# Altium PCB ArduinoUno_project.PcbDoc
Units mm, origin at the board's own origin, x right, y up, seen from the top; angles counter-clockwise.
Board outline 83.75 x 64.31 mm, 2 copper layers (Top Layer, Bottom Layer); 52 components, 58 nets, 214 pads, 25 vias.
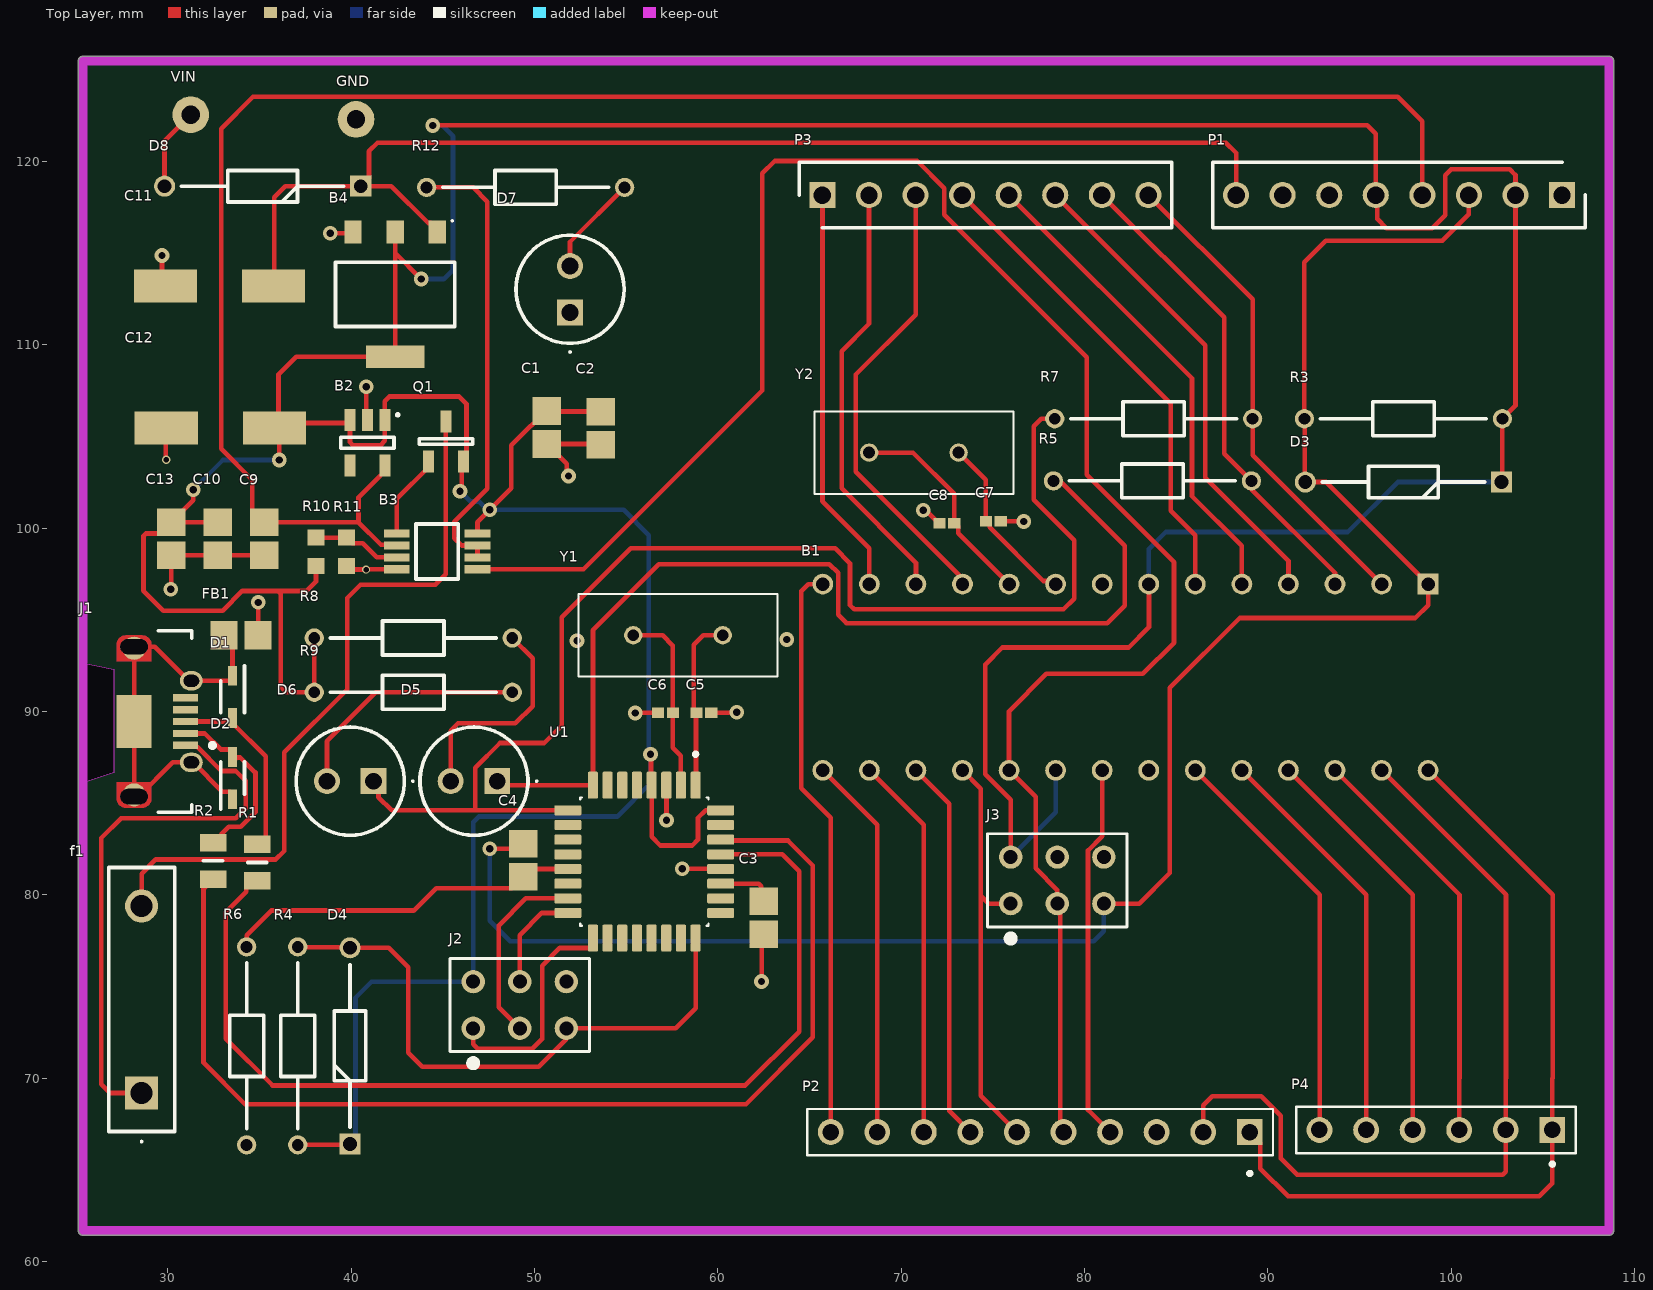
[diagram p0: Top Layer view]
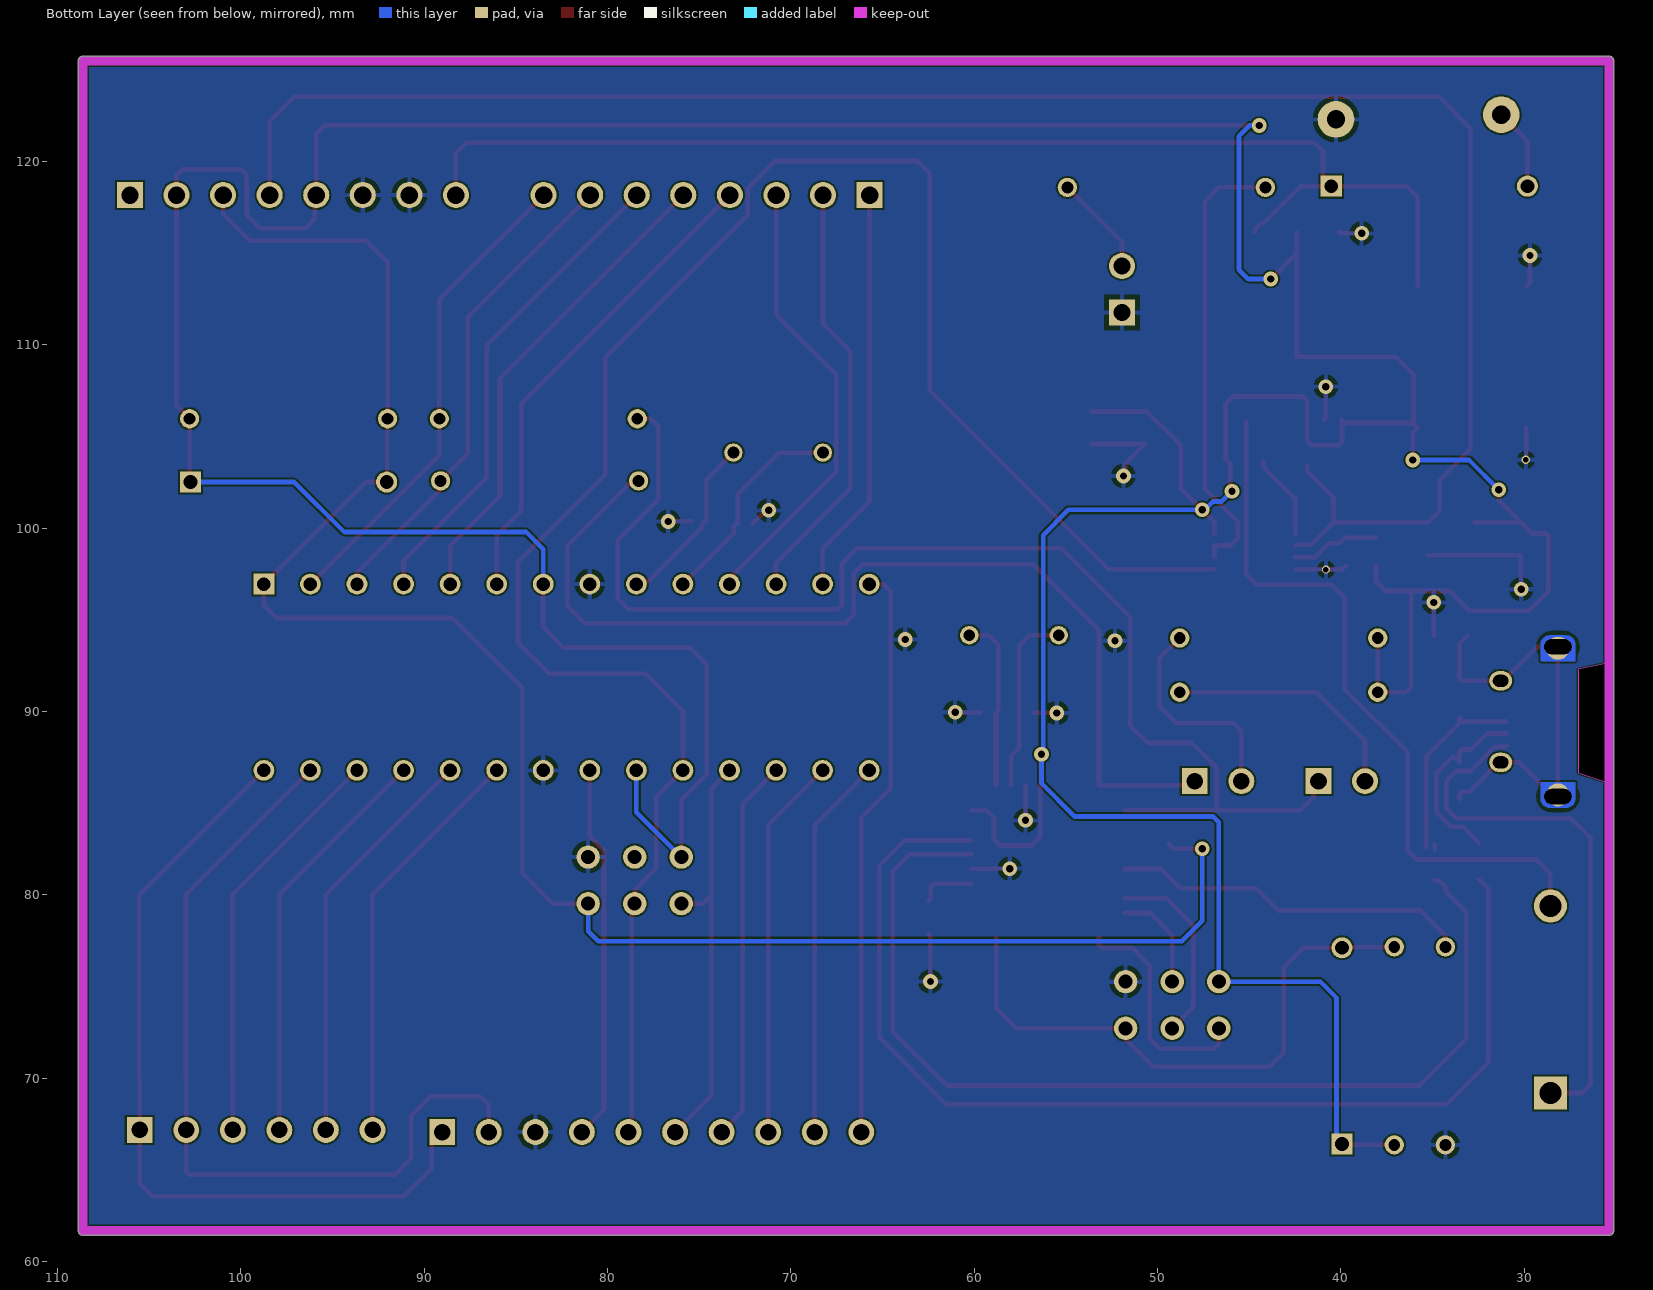
[diagram p1: Bottom Layer view, seen from below]
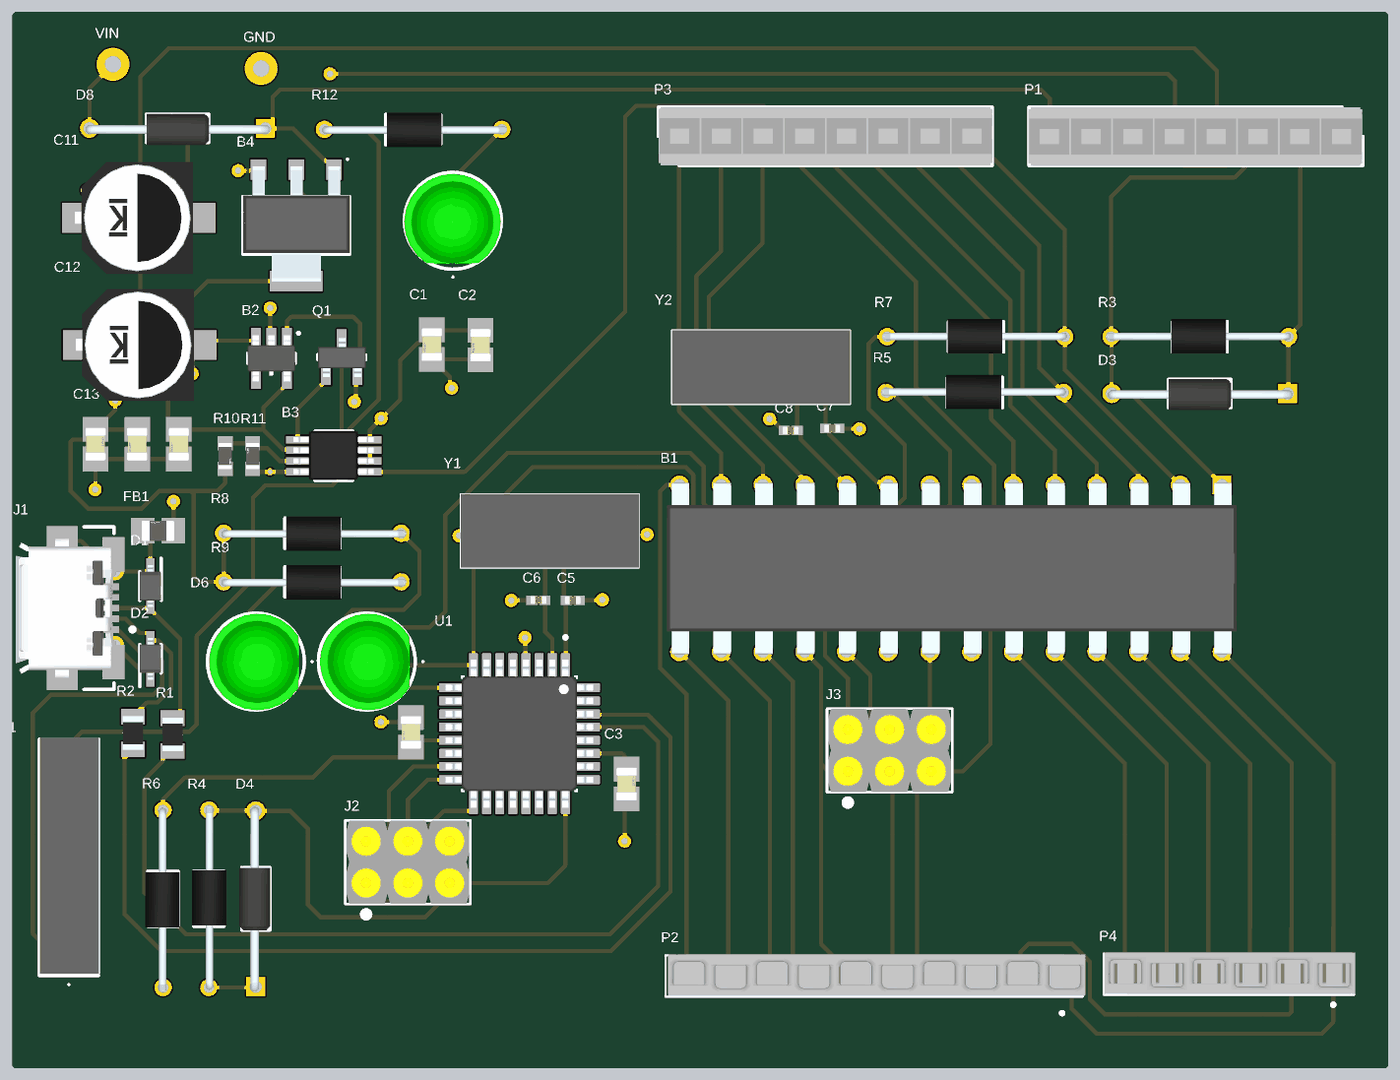
[diagram p2: 3D render of the assembled board from above, using the file's embedded part models]

## Layer stack, top to bottom
Top Solder: solder mask 0.0102, Solder Resist, Dk 3.5
Top Layer: signal copper 0.0356
Dielectric 1: dielectric 0.32, FR-4, Dk 4.8
Bottom Layer: signal copper 0.0356
Bottom Solder: solder mask 0.0102, Solder Resist, Dk 3.5

## Board outline
25.11,61.68 25.11,125.488 cw(c25.36,125.488) 25.36,125.738 108.61,125.738 cw(c108.61,125.488) 108.86,125.488 cw(c108.61,125.488) 108.858,125.454 cw(c108.61,125.42) 108.86,125.42 108.86,61.71 cw(c108.61,61.71) 108.86,61.695 cw(c108.61,61.68) 108.86,61.68 cw(c108.61,61.68) 108.61,61.43 25.36,61.43 cw(c25.36,61.68)

## Design rules (kind name [scope] priority, off if disabled: settings)
Clearance [All] p1: gap=0.1 ignorepadtopadclearanceinfootprint=FALSE
PolygonConnect [All] p1: connectstyle=Relief reliefconductorwidth=0.254 reliefentries=4 polygonreliefangle="90 Angle" airgapwidth=0.254
RoutingVias [All] p1: holewidth=0.711 width=1.27 viastyle="Through Hole" minholewidth=0.711 minwidth=1.27 maxholewidth=0.711 maxwidth=1.27
SolderMaskExpansion [All] p1: expansion=0.102
Width [All] p1: maxlimit=0.254 minlimit=0.254 preferedwidth=0.254
30 further rules are at their usual default settings.

## Components (designator, comment, footprint, x,y, rotation, side; value= is the part's Value field where it differs from the comment)
B1 "ATMEGA328-PU" DIP1016W53P254L3468H457Q28N 82.23,91.87 r270 top
B2 "LP2985-33DBVT" SOT95P280X145-5N 40.88,104.66 r270 top
B3 "LMV358IDGKR" SOP65P490X110-8N 44.68,98.73 r0 top
B4 "NCP1117ST50T3G" SOT230P700X180-4N 42.39,112.75 r270 top
C1 "100nF" C0805 50.65,105.491 r90 top
C2 "100nF" C0805 53.61,105.46 r90 top
C3 "1uF" C0805 62.5,78.75 r270 top
C4 "100nF" C0805 49.38,81.89 r90 top
C5 "22pF" C0402 59.23,89.93 r180 top
C6 "22pF" C0402 57.14,89.94 r180 top
C7 "22pF" C0402 75.02,100.39 r180 top
C8 "22pF" C0402 72.49,100.27 r180 top
C9 "1uF" C0805 35.25,99.43 r90 top
C10 "100nF" C0805 32.715,99.43 r90 top
C11 "47uF" CAPAE660X565N 32.81,113.21 r180 top
C12 "47uF" CAPAE660X565N 32.86,105.47 r180 top
C13 "100nF" C0805 30.18,99.43 r270 top
D1 "CDSOD323-T05S" SOD2513X114N 33.52,90.8 r270 top
D2 "CDSOD323-T05S" SOD2513X114N 33.52,86.37 r90 top
D3 "1N914" DIOAD1068W53L380D172 102.74,102.515 r180 top
D4 "1N914" DIOAD1068W53L380D172 39.93,66.41 r90 top
D5 "TLHG5420-ASZ" TLHG5420ASZ 47.96,86.2 r0 top
D6 "TLHG5420-ASZ" TLHG5420ASZ 41.21,86.2 r0 top
D7 "TLHG5420-ASZ" TLHG5420ASZ 51.93,111.76 r270 top
D8 "1N914" DIOAD1068W53L380D172 40.513,118.655 r180 top
f1 "PPTC" MFRHS10000 28.56,69.19 r90 top
FB1 "1 kOhms @ 100MHz" BLM21 33.984,94.16 r180 top
GND "Function" "Pin - 1" 40.259,122.301 r0 top
J1 "ZX62RD-AB-5P8(30)" FP-ZX62RD-AB-5P8_30-MFG 27.925,89.45 r270 top
J2 "TD-103-G-A" SAMTEC_TD-103-G-A 51.73,75.26 r0 top
J3 "TD-103-G-A" SAMTEC_TD-103-G-A 81.05,82.06 r0 top
P1 "8P" RHDR8W76P0X254_1X8_2032X356X673P 106.044,118.172 r180 top
P2 "1-215297-0" TE_1-215297-0 77.58,67.06 r180 top
P3 "8P" RHDR8W76P0X254_1X8_2032X356X673P 65.701,118.172 r0 top
P4 "6P" TE_215299-6 99.164,67.171 r180 top
Q1 "FDN340P" SOT95P237X112-3N 45.16,104.73 r90 top
R1 "22R" R0805 34.87,81.76 r270 top
R2 "22R" R0805 32.46,81.85 r270 top
R3 "10k" RESAD1075W45L335D185 91.99,105.97 r0 top
R4 "10k" RESAD1075W45L335D185 37.078,77.16 r270 top
R5 "1k" RESAD1075W45L335D185 78.3,102.58 r0 top
R6 "1k" RESAD1075W45L335D185 34.29,66.36 r90 top
R7 "1k" RESAD1075W45L335D185 78.37,105.97 r0 top
R8 "1k" RESAD1075W45L335D185 48.78,94.01 r180 top
R9 "1k" RESAD1075W45L335D185 48.78,91.05 r180 top
R10 "10k" RC0603 38.07,98.71 r270 top
R11 "10k" RC0603 39.74,98.71 r90 top
R12 "1k" RESAD1075W45L335D185 54.91,118.59 r180 top
U1 "ATMEGA16U2-AU" QFP80P900X900X120-32N 55.98,81.81 r270 top
VIN "Function" "Pin - 1" 31.242,122.555 r0 top
Y1 "ATS16B" ATS16B 55.38,94.16 r0 top
Y2 "ATS16B" ATS16B 68.25,104.12 r0 top

## Footprints (in the part's own frame and the unit in brackets; to place one, negate y for a bottom-side part, rotate by r counter-clockwise, add the part's x,y. Pads: shape width x height; smd on the part's side, far side on the other; paste and mask are expansions set on the pad)
ATS16B [mm]
  round 1 hole 0.65: 1(0,0) 2(4.88,0)
  silkscreen extent -2.99,-2.25 7.87,2.25, body extent -2.99,-2.25 7.87,2.25, height 4.4
BLM21 [mm]
  rect 1.455x1.556 smd paste+0 mask+0: 1(-0.926,0) 2(0.926,0)
  body extent -2.15,-1.28 2.15,1.28, height 0.25
C0402 [mm]
  rect 0.665x0.572 smd paste+0 mask+0: 1(-0.404,0) 2(0.404,0)
  body extent -0.89,-0.44 0.89,0.44, height 0.25
C0805 [mm]
  rect 1.505x1.556 smd paste+0 mask+0: 1(-0.901,0) 2(0.901,0)
  body extent -2.15,-1.28 2.15,1.28, height 0.25
CAPAE660X565N [mm]
  rect 3.45x1.8 smd: 1(-2.95,0) 2(2.95,0)
  body extent -3.71,-3.4 3.89,3.4, height 5.36
DIOAD1068W53L380D172 [mm]
  rect 1.15x1.15 / inner round 1.15 / far side rect 1.15x1.15 hole 0.75: 1(0,0)
  round 1.15 hole 0.75: 2(10.7,0)
  silkscreen extent 0.92,-0.86 9.77,0.86, body extent -0.27,-0.89 10.94,1.02, height 1.9
DIP1016W53P254L3468H457Q28N [mm]
  rect 1.133x1.133 / inner round 1.133 / far side rect 1.133x1.133 hole 0.733: 1(-5.08,16.51)
  round 1.133 hole 0.733: 2(-5.08,13.97) 3(-5.08,11.43) 4(-5.08,8.89) 5(-5.08,6.35) 6(-5.08,3.81) 7(-5.08,1.27) 8(-5.08,-1.27) 9(-5.08,-3.81) 10(-5.08,-6.35) 11(-5.08,-8.89) 12(-5.08,-11.43) 13(-5.08,-13.97) 14(-5.08,-16.51) 15(5.08,-16.51) 16(5.08,-13.97) 17(5.08,-11.43) 18(5.08,-8.89) 19(5.08,-6.35) 20(5.08,-3.81) 21(5.08,-1.27) 22(5.08,1.27) 23(5.08,3.81) 24(5.08,6.35) 25(5.08,8.89) 26(5.08,11.43) 27(5.08,13.97) 28(5.08,16.51)
  body extent -5.21,-17.27 5.21,17.4, height 4.57
FP-ZX62RD-AB-5P8_30-MFG [mm]
  rect 0.4x1.35 smd paste+0 mask+0: 1(1.3,3.025) 2(0.65,3.025) 3(0,3.025) 4(-0.65,3.025) 5(-1.3,3.025)
  rrect100% 1.05x1.25 hole 0.85 slot 0.65 at 0 deg paste-1000 mask+0: 6(-2.225,3.35) 7(2.225,3.35)
  rrect100% 0.825x1.5 hole 1.5 slot 0.825 at 0 deg paste-1000 mask+0: 8(-4.088,0.225) 10(4.088,0.225)
  round 1.26 smd paste-1000 mask+0: 8(-4,0.225) 10(4,0.225)
  round 1.26 smd far side paste-1000 mask+0: 8(-4,0.225) 10(4,0.225)
  rect 2.9x1.9 smd paste+0 mask+0: 9(0,0.225)
  Top Layer region: 3.3,1.175 4.2,1.175 4.391,1.137 4.554,1.029 4.662,0.866 4.7,0.675 4.7,0.675 4.7,-0.225 4.662,-0.416 4.554,-0.579 4.391,-0.687 4.2,-0.725 4.2,-0.725 3.3,-0.725
  Top Layer region: -3.3,-0.725 -4.2,-0.725 -4.391,-0.687 -4.554,-0.579 -4.662,-0.416 -4.7,-0.225 -4.7,-0.225 -4.7,0.675 -4.662,0.866 -4.554,1.029 -4.391,1.137 -4.2,1.175 -4.2,1.175 -3.3,1.175
  Bottom Layer region: -3.3,-0.725 -4.2,-0.725 -4.391,-0.687 -4.554,-0.579 -4.662,-0.416 -4.7,-0.225 -4.7,-0.225 -4.7,0.675 -4.662,0.866 -4.554,1.029 -4.391,1.137 -4.2,1.175 -4.2,1.175 -3.3,1.175
  Bottom Layer region: 3.3,1.175 4.2,1.175 4.391,1.137 4.554,1.029 4.662,0.866 4.7,0.675 4.7,0.675 4.7,-0.225 4.662,-0.416 4.554,-0.579 4.391,-0.687 4.2,-0.725 4.2,-0.725 3.3,-0.725
  Keep-Out Layer board cut-out: -2.844,-0.889 2.796,-0.889 3.367,-2.6 -3.2,-2.6
  silkscreen extent -4.95,1.55 4.95,4.62, body extent -5.1,-2.68 5.1,4.13, height 0.25
MFRHS10000 [mm]
  rect 1.8x1.8 hole 1.2: 1(0,0)
  round 1.8 hole 1.2: 2(10.2,0)
  silkscreen extent -2.7,-1.8 12.3,1.8, body extent -1.99,-1.82 12.41,1.78, height 28
"Pin - 1" [mm] "Test point pad"
  round 2 hole 1: 1(0,0)
QFP80P900X900X120-32N [mm]
  rrect25% 1.47x0.55 smd: 1(-4.17,2.8) 2(-4.17,2) 3(-4.17,1.2) 4(-4.17,0.4) 5(-4.17,-0.4) 6(-4.17,-1.2) 7(-4.17,-2) 8(-4.17,-2.8) 17(4.17,-2.8) 18(4.17,-2) 19(4.17,-1.2) 20(4.17,-0.4) 21(4.17,0.4) 22(4.17,1.2) 23(4.17,2) 24(4.17,2.8)
  rrect25% 0.55x1.47 smd: 9(-2.8,-4.17) 10(-2,-4.17) 11(-1.2,-4.17) 12(-0.4,-4.17) 13(0.4,-4.17) 14(1.2,-4.17) 15(2,-4.17) 16(2.8,-4.17) 25(2.8,4.17) 26(2,4.17) 27(1.2,4.17) 28(0.4,4.17) 29(-0.4,4.17) 30(-1.2,4.17) 31(-2,4.17) 32(-2.8,4.17)
  silkscreen extent -5.96,-3.5 3.5,3.5, body extent -4.5,-4.5 4.5,4.5, height 1.2
R0805 [mm]
  rect 0.95x1.45 smd: 1(-1,0) 2(1,0)
  silkscreen extent 0,-0.53 0,0.53, body extent -1.02,-0.63 1.02,0.63, height 0.5
RC0603 [mm]
  rect 0.859x0.912 smd paste+0 mask+0: 1(-0.777,0) 2(0.777,0)
  body extent -1.46,-0.71 1.46,0.71, height 0.25
RESAD1075W45L335D185 [mm]
  round 1.05 hole 0.65: 1(0,0) 2(10.8,0)
  silkscreen extent 0.87,-0.92 9.92,0.92, body extent -0.27,-1.02 10.93,1.08, height 2.09
RHDR8W76P0X254_1X8_2032X356X673P [mm]
  rect 1.425x1.425 / inner round 1.425 / far side rect 1.425x1.425 hole 0.95: 1(0,0)
  round 1.425 hole 0.95: 2(2.54,0) 3(5.08,0) 4(7.62,0) 5(10.16,0) 6(12.7,0) 7(15.24,0) 8(17.78,0)
  silkscreen extent -1.27,-1.78 19.05,1.78, body extent -1.24,-1.76 19.08,1.79, height 7
SAMTEC_TD-103-G-A [mil]
  round 50 hole 30: 1(-200,-100) 2(-200,0) 3(-100,-100) 4(-100,0) 5(0,-100) 6(0,0)
  silkscreen extent -250,-180 50,50, body extent -247,-150 47,50, height 326
SOD2513X114N [mm]
  rect 1.075x0.5 smd: 1(-1.15,0) 2(1.15,0)
  silkscreen extent -1.69,-0.65 0.87,0.65, body extent -1.27,-0.65 1.27,0.65, height 1.14
SOP65P490X110-8N [mm]
  rect 1.4x0.45 smd: 1(-2.2,0.975) 2(-2.2,0.325) 3(-2.2,-0.325) 4(-2.2,-0.975) 5(2.2,-0.975) 6(2.2,-0.325) 7(2.2,0.325) 8(2.2,0.975)
  silkscreen extent -1.15,-1.5 1.15,1.5, body extent -2.47,-1.49 2.43,1.51, height 1.1
SOT95P237X112-3N [mm]
  rect 1.2x0.6 smd: 1(-1.1,0.95) 2(-1.1,-0.95) 3(1.1,0)
  silkscreen extent -0.15,-1.46 0.15,1.46, body extent -1.21,-1.48 1.16,1.44, height 1.12
SOT95P280X145-5N [mm]
  rect 1.2x0.6 smd: 1(-1.25,0.95) 2(-1.25,0) 3(-1.25,-0.95) 4(1.25,-0.95) 5(1.25,0.95)
  silkscreen extent -1.55,-1.45 0.3,1.68, body extent -1.4,-1.45 1.4,1.45, height 1.2
SOT230P700X180-4N [mm]
  rect 1.25x0.95 smd: 1(-3.4,2.3) 2(-3.4,0) 3(-3.4,-2.3)
  rect 1.25x3.2 smd: 4(3.4,0)
  silkscreen extent -4.03,-3.25 1.75,3.25, body extent -3.58,-3.23 3.42,3.27, height 1.8
TE_1-215297-0 [mm]
  rect 1.408x1.408 hole 0.9: 1(-11.43,0)
  round 1.408 hole 0.9: 2(-8.89,0) 3(-6.35,0) 4(-3.81,0) 5(-1.27,0) 6(1.27,0) 7(3.81,0) 8(6.35,0) 9(8.89,0) 10(11.43,0)
  silkscreen extent -12.7,-1.26 12.7,2.36, body extent -12.85,-1.32 12.55,1.2, height 7
TE_215299-6 [mm]
  rect 1.408x1.408 hole 0.9: 1(-6.35,0)
  round 1.408 hole 0.9: 2(-3.81,0) 3(-1.27,0) 4(1.27,0) 5(3.81,0) 6(6.35,0)
  silkscreen extent -7.62,-1.26 7.62,1.96, body extent -7.68,-1.31 7.56,1.21, height 9
TLHG5420ASZ [mm]
  rect 1.416x1.416 hole 0.91: 1(0,0)
  round 1.416 hole 0.91: 2(-2.54,0)
  silkscreen extent -4.22,-2.95 2.2,2.95, body extent -4.12,-2.97 1.33,2.92, height 11.14

## Part data
B1: "8-bit Microcontrollers - MCU AVR 32K FLSH 1K EE2K SRAM-20MHz IND", Manufacturer_Name=Microchip, Mouser Part Number=556-ATMEGA328-PU, Datasheet Link=https://componentsearchengine.com/Datasheets/1/ATMEGA328-PU.pdf, Geometry.Height=4.572mm, Manufacturer_Part_Number=ATMEGA328-PU, Mouser Price/Stock=https://www.mouser.co.uk/ProductDetail/Microchip-Technology/ATMEGA328-PU?qs=lwdSMh1%2FoYJT8tfItQpQtA%3D%3D
B2: "150-mA LOW-NOISE LOW-DROPOUT REGULATOR WITH SHUTDOWN", Manufacturer_Name="Texas Instruments", Mouser Part Number=595-LP2985-33DBVT, Datasheet Link=http://www.ti.com/lit/gpn/lp2985, Geometry.Height=1.45mm, Manufacturer_Part_Number=LP2985-33DBVT, Mouser Price/Stock=https://www.mouser.co.uk/ProductDetail/Texas-Instruments/LP2985-33DBVT?qs=paYhMW8qfivCywxvLCGbYQ%3D%3D
B3: "OP Amp Dual GP R-R O/P 5.5V 8-Pin MSOP Texas Instruments LMV358IDGKR, Dual Op Amp, 1MHz CMOS, Rail to Rail, 3 V, 5 V, 8-Pin MSOP", Manufacturer_Name="Texas Instruments", Mouser Part Number=595-LMV358IDGKR, Datasheet Link=http://www.ti.com/lit/ds/symlink/lmv358.pdf, Geometry.Height=1.1mm, Manufacturer_Part_Number=LMV358IDGKR, Mouser Price/Stock=https://www.mouser.co.uk/ProductDetail/Texas-Instruments/LMV358IDGKR?qs=rgxfVHSNRPXxzk3brtXqQw%3D%3D
B4: "ON SEMICONDUCTOR - NCP1117ST50T3G - LDO, REG, 20VIN, 1A, 5V, 1%, SOT223-3", Manufacturer_Name=onsemi, Mouser Part Number=863-NCP1117ST50T3G, Datasheet Link=http://www.onsemi.com/pub/Collateral/NCP1117-D.PDF, Geometry.Height=1.8mm, Manufacturer_Part_Number=NCP1117ST50T3G, Mouser Price/Stock=https://www.mouser.co.uk/ProductDetail/onsemi/NCP1117ST50T3G?qs=Gev%252BmEvV0ib6dijy6U0dhQ%3D%3D
C1 C2 C4 C10 C13: library part C0805C104M3RACTU, "Cap Ceramic 0.1uF 25V X7R 20% SMD 0805 125°C Paper T/R", Case/Package=0805, Case Code (Metric)=2012, Dielectric=X7R, Dielectric Material=Ceramic, Manufacturer=KEMET, Max Operating Temperature=125°C, Min Operating Temperature=-55°C, Package Quantity=1, Supplier Part Number 1=399-C0805C104M3RAC7800CT-ND, Tolerance=20%, Voltage=25V, Capacitance=100nF, Case Code (Imperial)=0805, ComponentLink1Description=http://www.farnell.com/datasheets/2746330.pdf?src-supplier=Farnell, ComponentLink1URL=http://www.farnell.com/datasheets/2746330.pdf?src-supplier=Farnell, ComponentLink2Description=https://www.alliedelec.com/m/d/6f3b5eb83d09db50ed28bdc730567b33.pdf?src-supplier=Allied+Electronics, ComponentLink2URL=https://www.alliedelec.com/m/d/6f3b5eb83d09db50ed28bdc730567b33.pdf?src-supplier=Allied+Electronics, ComponentLink3Description=http://uk.rs-online.com/webdocs/13da/0900766b813daa05.pdf?src-supplier=RSComponents, ComponentLink3URL=http://uk.rs-online.com/webdocs/13da/0900766b813daa05.pdf?src-supplier=RSComponents, ComponentLink4Description=http://uk.rs-online.com/webdocs/13da/0900766b813da9ff.pdf?src-supplier=RSComponents, ComponentLink4URL=http://uk.rs-online.com/webdocs/13da/0900766b813da9ff.pdf?src-supplier=RSComponents, ComponentLink5Description=https://www.alliedelec.com/m/d/e7aa2b5497e2375e4ffc0e8be19e16e2.pdf?src-supplier=Allied+Electronics, ComponentLink5URL=https://www.alliedelec.com/m/d/e7aa2b5497e2375e4ffc0e8be19e16e2.pdf?src-supplier=Allied+Electronics, ComponentLink6Description=http://www.jameco.com/Jameco/Products/ProdDS/1566487.pdf?src-supplier=Jameco, ComponentLink6URL=http://www.jameco.com/Jameco/Products/ProdDS/1566487.pdf?src-supplier=Jameco, ComponentLink7Description=http://www.mouser.com/ds/2/212/KEM_C1002_X7R_SMD-1102033.pdf?src-supplier=Mouser, ComponentLink7URL=http://www.mouser.com/ds/2/212/KEM_C1002_X7R_SMD-1102033.pdf?src-supplier=Mouser, ComponentLink8Description=http://components.arrow.com/part/dataview/2091097S3491315N7429?src-supplier=Arrow+Electronics, ComponentLink8URL=http://components.arrow.com/part/dataview/2091097S3491315N7429?src-supplier=Arrow+Electronics, ComponentLink9Description=http://components.arrow.com/part/dataview/0323_00178100?src-supplier=Arrow+Europe, ComponentLink9URL=http://components.arrow.com/part/dataview/0323_00178100?src-supplier=Arrow+Europe, ComponentLink10Description=https://api.kemet.com/component-edge/download/datasheet/C0805C104M3RACTU.pdf?src-supplier=Digi-Key, ComponentLink10URL=https://api.kemet.com/component-edge/download/datasheet/C0805C104M3RACTU.pdf?src-supplier=Digi-Key, ComponentLink11Description=http://www.farnell.com/datasheets/2746330.pdf?src-supplier=Newark, ComponentLink11URL=http://www.farnell.com/datasheets/2746330.pdf?src-supplier=Newark, ComponentLink12Description=http://www.farnell.com/datasheets/1828800.pdf?src-supplier=Newark, ComponentLink12URL=http://www.farnell.com/datasheets/1828800.pdf?src-supplier=Newark, ComponentLink13Description=http://capacitoredge.kemet.com/capedge2/DataSheet?pn=C0805C104M3RACTU&src-supplier=Avnet, ComponentLink13URL=http://capacitoredge.kemet.com/capedge2/DataSheet?pn=C0805C104M3RACTU&src-supplier=Avnet, ComponentLink14Description=http://www.farnell.com/datasheets/2746330.pdf?src-supplier=Element14, ComponentLink14URL=http://www.farnell.com/datasheets/2746330.pdf?src-supplier=Element14, Construction=Flat, Depth=1.25mm, Dissipation Factor=5%, Height=0.9mm, Lead Pitch=0.75mm, Length=2mm, Manufacturer Part Number=C0805C104M3RACTU, Mount="Surface Mount", Packaging="Tape and Reel", Pricing 1="1 = 0,10000, 10 = 0,06200, 50 = 0,03360, 100 = 0,02750, 500 = 0,01964, 1000 = 0,01543 (USD)", Radiation Hardening=No, REACH SVHC="No SVHC", RoHS=Yes, Series=C0805C, Stock 1=190801, Supplier 1=Digi-Key, Termination=SMD/SMT, Thickness=0.035inch, Voltage Rating=25V, Voltage Rating (DC)=25V, Width=0.049inch
C3 C9: library part C0805C105M3RACTU, "Multilayer Ceramic Capacitors MLCC - SMD/SMT 25V 1uF X7R 0805 20%", Case/Package=0805, Case Code (Metric)=2012, Dielectric=X7R, Dielectric Material=Ceramic, Manufacturer=KEMET, Manufacturer Part Number=C0805C104M3RACTU, Max Operating Temperature=125°C, Min Operating Temperature=-55°C, Package Quantity=1, Supplier Part Number 1=399-C0805C104M3RAC7800CT-ND, Tolerance=20%, Voltage=25V, Capacitance=1uF, Case Code (Imperial)=0805, ComponentLink1Description=http://www.farnell.com/datasheets/2746330.pdf?src-supplier=Farnell, ComponentLink1URL=http://www.farnell.com/datasheets/2746330.pdf?src-supplier=Farnell, ComponentLink2Description=https://www.alliedelec.com/m/d/6f3b5eb83d09db50ed28bdc730567b33.pdf?src-supplier=Allied+Electronics, ComponentLink2URL=https://www.alliedelec.com/m/d/6f3b5eb83d09db50ed28bdc730567b33.pdf?src-supplier=Allied+Electronics, ComponentLink3Description=http://uk.rs-online.com/webdocs/13da/0900766b813daa05.pdf?src-supplier=RSComponents, ComponentLink3URL=http://uk.rs-online.com/webdocs/13da/0900766b813daa05.pdf?src-supplier=RSComponents, ComponentLink4Description=http://uk.rs-online.com/webdocs/13da/0900766b813da9ff.pdf?src-supplier=RSComponents, ComponentLink4URL=http://uk.rs-online.com/webdocs/13da/0900766b813da9ff.pdf?src-supplier=RSComponents, ComponentLink5Description=https://www.alliedelec.com/m/d/e7aa2b5497e2375e4ffc0e8be19e16e2.pdf?src-supplier=Allied+Electronics, ComponentLink5URL=https://www.alliedelec.com/m/d/e7aa2b5497e2375e4ffc0e8be19e16e2.pdf?src-supplier=Allied+Electronics, ComponentLink6Description=http://www.jameco.com/Jameco/Products/ProdDS/1566487.pdf?src-supplier=Jameco, ComponentLink6URL=http://www.jameco.com/Jameco/Products/ProdDS/1566487.pdf?src-supplier=Jameco, ComponentLink7Description=http://www.mouser.com/ds/2/212/KEM_C1002_X7R_SMD-1102033.pdf?src-supplier=Mouser, ComponentLink7URL=http://www.mouser.com/ds/2/212/KEM_C1002_X7R_SMD-1102033.pdf?src-supplier=Mouser, ComponentLink8Description=http://components.arrow.com/part/dataview/2091097S3491315N7429?src-supplier=Arrow+Electronics, ComponentLink8URL=http://components.arrow.com/part/dataview/2091097S3491315N7429?src-supplier=Arrow+Electronics, ComponentLink9Description=http://components.arrow.com/part/dataview/0323_00178100?src-supplier=Arrow+Europe, ComponentLink9URL=http://components.arrow.com/part/dataview/0323_00178100?src-supplier=Arrow+Europe, ComponentLink10Description=https://api.kemet.com/component-edge/download/datasheet/C0805C104M3RACTU.pdf?src-supplier=Digi-Key, ComponentLink10URL=https://api.kemet.com/component-edge/download/datasheet/C0805C104M3RACTU.pdf?src-supplier=Digi-Key, ComponentLink11Description=http://www.farnell.com/datasheets/2746330.pdf?src-supplier=Newark, ComponentLink11URL=http://www.farnell.com/datasheets/2746330.pdf?src-supplier=Newark, ComponentLink12Description=http://www.farnell.com/datasheets/1828800.pdf?src-supplier=Newark, ComponentLink12URL=http://www.farnell.com/datasheets/1828800.pdf?src-supplier=Newark, ComponentLink13Description=http://capacitoredge.kemet.com/capedge2/DataSheet?pn=C0805C104M3RACTU&src-supplier=Avnet, ComponentLink13URL=http://capacitoredge.kemet.com/capedge2/DataSheet?pn=C0805C104M3RACTU&src-supplier=Avnet, ComponentLink14Description=http://www.farnell.com/datasheets/2746330.pdf?src-supplier=Element14, ComponentLink14URL=http://www.farnell.com/datasheets/2746330.pdf?src-supplier=Element14, Construction=Flat, Depth=1.25mm, Dissipation Factor=5%, Height=0.9mm, Lead Pitch=0.75mm, Length=2mm, Mount="Surface Mount", Packaging="Tape and Reel", Pricing 1="1 = 0,10000, 10 = 0,06200, 50 = 0,03360, 100 = 0,02750, 500 = 0,01964, 1000 = 0,01543 (USD)", Radiation Hardening=No, REACH SVHC="No SVHC", RoHS=Yes, Series=C0805C, Stock 1=190801, Supplier 1=Digi-Key, Termination=SMD/SMT, Thickness=0.035inch, Voltage Rating=25V, Voltage Rating (DC)=25V, Width=0.049inch
C5 C6 C7 C8: library part C0402C220K5GACTU, "CAP CER 22PF 50V C0G/NP0 0402", Case/Package=0402, Case Code (Metric)=1005, Dielectric=C0G, Dielectric Material=Ceramic, Manufacturer=KEMET, Max Operating Temperature=125°C, Min Operating Temperature=-55°C, Package Quantity=1, Supplier Part Number 1=399-7775-1-ND, Tolerance=10%, Voltage Rating=50V, Capacitance=22pF, Case Code (Imperial)=0402, Category="Ceramic Capacitors", ComponentLink1Description=https://datasheet.ciiva.com/18192/getdatasheetpartid-362104-18192458.pdf?src-supplier=Verical, ComponentLink1URL=https://datasheet.ciiva.com/18192/getdatasheetpartid-362104-18192458.pdf?src-supplier=Verical, ComponentLink2Description=https://datasheet.ciiva.com/6874/1828801-6874332.pdf?src-supplier=Newark, ComponentLink2URL=https://datasheet.ciiva.com/6874/1828801-6874332.pdf?src-supplier=Newark, ComponentLink3Description=https://datasheet.ciiva.com/5423/kem-c1003-c0g-smd-356956-5423869.pdf?src-supplier=Mouser, ComponentLink3URL=https://datasheet.ciiva.com/5423/kem-c1003-c0g-smd-356956-5423869.pdf?src-supplier=Mouser, Depth=0.5mm, Dissipation Factor=0.1%, Height=0.5mm, Lead Free="Lead Free", Lead Pitch=0.3mm, Length=1mm, Manufacturer Part Number=C0402C220K5GACTU, Mount="Surface Mount", Packaging="Tape and Reel", Pricing 1="1=0,10000, 10=0,02100, 50=0,01160, 100=0,00950, 500=0,00678, 1000=0,00532, 2500=0,00484, 5000=0,00445 (USD)", Radiation Hardening=No, REACH SVHC="No SVHC", RoHS=Yes, Stock 1=2121934, Supplier 1=Digi-Key, Termination=SMD/SMT, Thickness=0.022inch, Voltage Rating (DC)=50V, Width=0.02inch
C11 C12: library part EDK476M025A9GAA, "Cap Aluminum 47uF 25V 20% (6.3 X 5.4mm) SMD 70mA 2000 hr 85°C T/R -    PN Alternativo : EDK476M025A9GAA", Case/Package=Radial, Manufacturer=KEMET, Max Operating Temperature=85°C, Min Operating Temperature=-40°C, Package Quantity=1, Ripple Current=70mA, Supplier Part Number 1=80-EDK476M025A9GAA, Tolerance=20%, Voltage Rating=25V, Capacitance=47uF, ComponentLink1Description=https://datasheet.ciiva.com/5365/kem-a4001-edk-535350-5365071.pdf?src-supplier=Mouser, ComponentLink1URL=https://datasheet.ciiva.com/5365/kem-a4001-edk-535350-5365071.pdf?src-supplier=Mouser, Construction=Cylindrical, Diameter=6.3mm, Height=5.4mm, Height - Seated (Max)=0.217inch, Length=5.5mm, Life (Hours)=2000Hour, Manufacturer Part Number=EDK476M025A9GAA, Mount="Surface Mount,PCB", Packaging="Tape and Reel", Pricing 1="1 = 0,39000, 10 = 0,19000, 50 = 0,19000, 100 = 0,16300, 1000 = 0,10200, 10000 = 0,08100 (USD)", Radiation Hardening=No, REACH SVHC="No SVHC", Ripple Current (AC)=70mA, RoHS=Yes, RoHS Compliant=Yes, Series=EDK, Stock 1=8213, Supplier 1=Mouser, Termination=SMD/SMT, Voltage Rating (DC)=25V
D1 D2: "TVS Diode (Uni-directional)", Manufacturer_Name=Bourns, Mouser Part Number=652-CDSOD323-T05S, Arrow Part Number=CDSOD323-T05S, Arrow Price/Stock=https://www.arrow.com/en/products/cdsod323-t05s/bourns?region=nac, Datasheet Link=http://www.bourns.com/docs/Product-Datasheets/CDSOD323-TxxSC.pdf, Height=1.14mm, Manufacturer_Part_Number=CDSOD323-T05S, Mouser Price/Stock=https://www.mouser.co.uk/ProductDetail/Bourns/CDSOD323-T05S?qs=6S5Watp5UnKwEEYVMBfMmA%3D%3D
D3 D4 D8: "Small Signal Diode", Manufacturer_Name=onsemi, Mouser Part Number=512-1N914, Datasheet Link=https://www.onsemi.com/pub/Collateral/1N914-D.PDF, Manufacturer_Part_Number=1N914, Mouser Price/Stock=https://www.mouser.co.uk/ProductDetail/onsemi-Fairchild/1N914?qs=NSEUUqpg2uCfNuQFcxVZsA%3D%3D
D5 D6 D7: "Standard LEDs - Through Hole 5MM LED GREEN TINT. DIFFused with Standoff", Manufacturer_Name=Vishay, Mouser Part Number=78-TLHG5420-ASZ, Datasheet Link=https://www.vishay.com/docs/86335/tlhg542_tlhg642.pdf, Geometry.Height=12.8mm, Manufacturer_Part_Number=TLHG5420-ASZ, Mouser Price/Stock=https://www.mouser.co.uk/ProductDetail/Vishay-Siliconix/TLHG5420-ASZ?qs=M%2FWrVUahkW9Iv5EBNpgqMA%3D%3D
f1: library part MF-RHS1000-0, "PTC 10.0A 16V RADIAL LEADED HI-TEMP", Manufacturer_Name=Bourns, Mouser Part Number=652-MF-RHS1000-0, Geometry.Height=27.9mm, Manufacturer_Part_Number=MF-RHS1000-0, Mouser Price/Stock=https://www.mouser.co.uk/ProductDetail/Bourns/MF-RHS1000-0?qs=mELouGlnn3f3cOBjSincOA%3D%3D
FB1: library part BLM21AG102SN1D, "MURATA - BLM21AG102SN1D - Ferritperle, 0805 [Metrisch 2012], 1 kohm, 500 mA, Baureihe BLM21A, 0.28 ohm, ± 25% / PN Alternativo: BLM21BD102SN1D", Case/Package=0805, Case Code (Metric)=2012, Continuous Drain Current (ID)=20A, Current Rating=500mA, DC Current=200mA, DC Resistance (DCR)=280mR, Drain to Source Breakdown Voltage=60V, Drain to Source Resistance=24mR, Frequency=100MHz, Gate to Source Voltage (Vgs)=20V, Input Capacitance=850pF, Manufacturer=Murata, Max Current Rating=600mA, Max Operating Temperature=125°C, Max Power Dissipation=3.1W, Min Operating Temperature=-55°C, Package Quantity=1, Power Dissipation=19W, Supplier Part Number 1=490-1041-1-ND, Threshold Voltage=3V, Tolerance=25%, Case Code (Imperial)=0805, Category=Inductors, ComponentLink1Description=https://datasheet.ciiva.com/19454/1845136-19454717.pdf?src-supplier=Jameco, ComponentLink1URL=https://datasheet.ciiva.com/19454/1845136-19454717.pdf?src-supplier=Jameco, ComponentLink2Description=https://datasheet.ciiva.com/18093/getdatasheetpartid-139643-18093010.pdf?src-supplier=Verical, ComponentLink2URL=https://datasheet.ciiva.com/18093/getdatasheetpartid-139643-18093010.pdf?src-supplier=Verical, ComponentLink3Description=https://datasheet.ciiva.com/41449/001172322-da-01-en-drossel-0805-1000r-2-0x1-25mm-4000st-41449636.pdf?src-supplier=Conrad, ComponentLink3URL=https://datasheet.ciiva.com/41449/001172322-da-01-en-drossel-0805-1000r-2-0x1-25mm-4000st-41449636.pdf?src-supplier=Conrad, ComponentLink4Description=https://datasheet.ciiva.com/29347/442432-da-01-en-chip-drossel-0805-1000r-200ma-2-0x1-25mm-29347996.pdf?src-supplier=Conrad, ComponentLink4URL=https://datasheet.ciiva.com/29347/442432-da-01-en-chip-drossel-0805-1000r-200ma-2-0x1-25mm-29347996.pdf?src-supplier=Conrad, ComponentLink5Description=https://datasheet.ciiva.com/25903/l0110s0100blm21a-25903493.pdf?src-supplier=Avnet+Europe, ComponentLink5URL=https://datasheet.ciiva.com/25903/l0110s0100blm21a-25903493.pdf?src-supplier=Avnet+Europe, ComponentLink6Description=https://datasheet.ciiva.com/3081/l0110s0100blm21a-3081640.pdf?src-supplier=Avnet, ComponentLink6URL=https://datasheet.ciiva.com/3081/l0110s0100blm21a-3081640.pdf?src-supplier=Avnet, ComponentLink7Description=https://datasheet.ciiva.com/6212/l0110s0100blm21a-6212345.pdf?src-supplier=Digi-Key, ComponentLink7URL=https://datasheet.ciiva.com/6212/l0110s0100blm21a-6212345.pdf?src-supplier=Digi-Key, ComponentLink8Description=https://datasheet.ciiva.com/6212/l0110s0100blm21a-6212347.pdf?src-supplier=Digi-Key, ComponentLink8URL=https://datasheet.ciiva.com/6212/l0110s0100blm21a-6212347.pdf?src-supplier=Digi-Key, ComponentLink9Description=https://datasheet.ciiva.com/16286/l0110s0100blm21a-16286461.pdf?src-supplier=Future+Electronics, ComponentLink9URL=https://datasheet.ciiva.com/16286/l0110s0100blm21a-16286461.pdf?src-supplier=Future+Electronics, ComponentLink10Description=https://datasheet.ciiva.com/6212/l0110s0100blm21a-6212318.pdf?src-supplier=Digi-Key, ComponentLink10URL=https://datasheet.ciiva.com/6212/l0110s0100blm21a-6212318.pdf?src-supplier=Digi-Key, ComponentLink11Description=https://datasheet.ciiva.com/3082/l0110s0100blm21a-3082728.pdf?src-supplier=Avnet, ComponentLink11URL=https://datasheet.ciiva.com/3082/l0110s0100blm21a-3082728.pdf?src-supplier=Avnet, ComponentLink12Description=https://datasheet.ciiva.com/8021/l0110s0100blm21a-8021548.pdf?src-supplier=Element14, ComponentLink12URL=https://datasheet.ciiva.com/8021/l0110s0100blm21a-8021548.pdf?src-supplier=Element14, ComponentLink13Description=https://datasheet.ciiva.com/8021/l0110s0100blm21a-8021550.pdf?src-supplier=Element14, ComponentLink13URL=https://datasheet.ciiva.com/8021/l0110s0100blm21a-8021550.pdf?src-supplier=Element14, ComponentLink14Description=https://datasheet.ciiva.com/6380/nttfs5826nl-d-6380502.pdf?src-supplier=Digi-Key, ComponentLink14URL=https://datasheet.ciiva.com/6380/nttfs5826nl-d-6380502.pdf?src-supplier=Digi-Key, ComponentLink15Description=https://datasheet.ciiva.com/11166/nttfs5826nl-d-11166227.pdf?src-supplier=Avnet, ComponentLink15URL=https://datasheet.ciiva.com/11166/nttfs5826nl-d-11166227.pdf?src-supplier=Avnet, ComponentLink16Description=https://datasheet.ciiva.com/26145/nttfs5826nl-d-26145731.pdf?src-supplier=Avnet+Europe, ComponentLink16URL=https://datasheet.ciiva.com/26145/nttfs5826nl-d-26145731.pdf?src-supplier=Avnet+Europe, ComponentLink17Description=https://datasheet.ciiva.com/4438/nttfs5826nl-d-97426-4438348.pdf?src-supplier=Mouser, ComponentLink17URL=https://datasheet.ciiva.com/4438/nttfs5826nl-d-97426-4438348.pdf?src-supplier=Mouser, ComponentLink18Description=https://datasheet.ciiva.com/30480/0900766b8120607b-30480146.pdf?src-supplier=RSComponents, ComponentLink18URL=https://datasheet.ciiva.com/30480/0900766b8120607b-30480146.pdf?src-supplier=RSComponents, ComponentLink19Description=https://datasheet.ciiva.com/6380/nttfs5826nl-d-6380508.pdf?src-supplier=Digi-Key, ComponentLink19URL=https://datasheet.ciiva.com/6380/nttfs5826nl-d-6380508.pdf?src-supplier=Digi-Key, Core Material=Ferrite, Depth=1.25mm, Drain to Source Voltage (Vdss)=60V, Element Configuration=Single, Height=0.85mm, Impedance=1kR, Lead Free="Lead Free", Length=2mm, Manufacturer Part Number=BLM21AG102SN1D, Material=Steel,Ferrite, Max DC Current=200mA, Military Standard=Not, Number of Circuits=1, Number of Elements=1, Number of Lines=1, Number of Pins=2, Packaging="Tape and Reel", Polarity=N-CHANNEL, Pricing 1="1=0,17000, 10=0,14100, 25=0,10960, 50=0,09100, 100=0,07840, 250=0,06272, 500=0,05644, 1000=0,04703 (USD)", Pricing 2="1 = 0,93000, 10 = 0,82200, 100 = 0,63010, 500 = 0,49808 (USD)", Radiation Hardening=No, Rds On Max=24mR, REACH SVHC="No SVHC", RoHS=Yes, RoHS Compliant=Yes, Series=-, Shielding=Unshielded, Stock 1=93441, Supplier 1=Digi-Key, Supplier 2=Digi-Key, Termination=SMD/SMT, Test Frequency=100MHz, Turn-Off Delay Time=17ns, Turn-On Delay Time=9ns, Weight=0.000194oz, Width=1.25mm
GND VIN: library part PIN
J1: library part "USB Connector", "CONN RCPT USB2.0 MICRO AB SMD RA", Manufacturer="Hirose Connector", Connector Type=USB, Contact Material="Copper Alloy", Contact Plating=Gold, Gender=Receptacle, Lead Free="Lead Free", Manufacturer Part Number=ZX62RD-AB-5P8(30), Mount="Surface Mount", Number of Contacts=5, Orientation="Right Angle", Packaging="Tape and Reel", RoHS Compliant=Yes, USB Standard="USB 2.0"
J2 J3: "Connecteur Embase Trou traversant 6 positions 0,100po (2,54mm)", Package=None, Check_prices=https://www.snapeda.com/parts/TD-103-G-A/Samtec+Inc./view-part/?ref=eda, MF="Samtec Inc.", MP=TD-103-G-A, SnapEDA_Link=https://www.snapeda.com/parts/TD-103-G-A/Samtec+Inc./view-part/?ref=snap
P1 P3: library part 5-535541-6, "Connector Socket Strip RCP 8 POS 2.54mm Solder ST Thru-Hole Gang of Tubes", Package=None, Availability=Unavailable, MF="TE Connectivity", MP=5-535541-6, Price=None, SnapEDA_Link=https://www.snapeda.com/parts/5-535541-6/TE%20Connectivity%20AMP%20Connectors/view-part/497141/?ref=snap
P2: "10P HV100 REC CON. TE, 7.0MM", Package=None, Availability=Unavailable, EU_RoHS_Compliance=Compliant, MF="TE Connectivity", MP=1-215297-0, Price=None, SnapEDA_Link=https://www.snapeda.com/parts/1-215297-0/TE%20Connectivity%20AMP%20Connectors/view-part/2366147/?ref=snap, TE_purchase_URL=https://www.te.com/usa-en/product-1-215297-0.html?te_bu=Cor&te_type=disp&te_campaign=seda_glo_cor-seda-global-disp-prtnr-fy19-seda-model-bom-cta_sma-317_1&elqCampaignId=32493
P4: library part 215299-6, Package=None, Availability=Unavailable, MF="{'manufacturer': 'TE Connectivity'}", MP=215299-6, Price=None
Q1: "Trans MOSFET P-CH 20V 2A 3-Pin SuperSOT", Manufacturer_Name=onsemi, Mouser Part Number=512-FDN340P, Datasheet Link=https://www.onsemi.com/pub/Collateral/FDN340P-D.PDF, Geometry.Height=1.12mm, Manufacturer_Part_Number=FDN340P, Mouser Price/Stock=https://www.mouser.co.uk/ProductDetail/onsemi-Fairchild/FDN340P?qs=AMp2PTjoga9dhzFXRaqTZw%3D%3D
R1 R2: library part RCA080522R0FKEA, "Thick Film Resistors - SMD 22ohms 1% 100ppm", Manufacturer_Name=Vishay, Mouser Part Number=71-RCA080522R0FKEA, Datasheet Link=https://www.mouser.se/datasheet/2/427/rcae3-1761931.pdf, Height=0.5mm, Manufacturer_Part_Number=RCA080522R0FKEA, Mouser Price/Stock=https://www.mouser.co.uk/ProductDetail/Vishay-Draloric/RCA080522R0FKEA?qs=AvgxZrxb8y2flqwx8oksMg%3D%3D
R3 R4: library part MFS1_4CC1002F, "Fixed Resistor, Metal Film, 0.25W, 10000ohm, 250V, 1% +/-Tol, 50ppm/Cel, Through Hole Mount", Manufacturer_Name="KOA Speer", Manufacturer_Part_Number=MFS1/4CC1001F, Mouser Part Number=660-MFS1/4CC1001F, Datasheet Link=https://www.koaspeer.com/catimages/Products/MF-MFS-RK/MF-MFS-RK.pdf, Mouser Price/Stock=https://www.mouser.co.uk/ProductDetail/KOA-Speer/MFS1-4CC1001F?qs=W1HJaynCbQwggh46CLL3yw%3D%3D
R5 R6 R7 R8 R9 R12: library part MFS1_4CC1001F, "KOA Axial Metal Film Resistor 1k +/-1% 0.25W +/-50ppm/C", Manufacturer_Name="KOA Speer", Manufacturer_Part_Number=MFS1/4CC1001F, Mouser Part Number=660-MFS1/4CC1001F, Datasheet Link=https://www.koaspeer.com/catimages/Products/MF-MFS-RK/MF-MFS-RK.pdf, Mouser Price/Stock=https://www.mouser.co.uk/ProductDetail/KOA-Speer/MFS1-4CC1001F?qs=W1HJaynCbQwggh46CLL3yw%3D%3D
R10 R11: library part RC0603FR-0710KL, "10 kOhms ±1% 0.1W, 1/10W Chip Resistor 0603 (1608 Metric)  Thick Film", Case/Package=0603, Case Code (Metric)=1608, Manufacturer=Yageo, Max Operating Temperature=155°C, Min Operating Temperature=-55°C, Power Rating=100mW, Resistance=10kR, Resistor Type="Thick Film", Supplier Part Number 1=311-10.0KHRCT-ND, Temperature Coefficient=100ppm/°C, Tolerance=1%, Voltage Rating=75V, Voltage Rating (DC)=50V, Case Code (Imperial)=0603, ComponentLink1Description=https://datasheet.ciiva.com/7660/38590-7660789.pdf?src-supplier=Element14, ComponentLink1URL=https://datasheet.ciiva.com/7660/38590-7660789.pdf?src-supplier=Element14, ComponentLink2Description=https://datasheet.ciiva.com/15189/getdatasheetpartid-409289-15189591.pdf?src-supplier=Verical, ComponentLink2URL=https://datasheet.ciiva.com/15189/getdatasheetpartid-409289-15189591.pdf?src-supplier=Verical, ComponentLink3Description=https://datasheet.ciiva.com/46440/1868787-46440891.pdf?src-supplier=Element14, ComponentLink3URL=https://datasheet.ciiva.com/46440/1868787-46440891.pdf?src-supplier=Element14, ComponentLink4Description=https://datasheet.ciiva.com/7983/443971-7983596.pdf?src-supplier=Element14, ComponentLink4URL=https://datasheet.ciiva.com/7983/443971-7983596.pdf?src-supplier=Element14, ComponentLink5Description=https://datasheet.ciiva.com/7746/1738695-7746239.pdf?src-supplier=Element14, ComponentLink5URL=https://datasheet.ciiva.com/7746/1738695-7746239.pdf?src-supplier=Element14, ComponentLink6Description=https://datasheet.ciiva.com/22747/443971-22747519.pdf?src-supplier=Element14, ComponentLink6URL=https://datasheet.ciiva.com/22747/443971-22747519.pdf?src-supplier=Element14, Depth=0.8mm, Height=0.45mm, Lead Free="Lead Free", Lead Pitch=0.3mm, Length=1.6mm, Manufacturer Part Number=RC0603FR-0710KL, Military Standard=Not, Number of Pins=2, Packaging="Tape and Reel", Pricing 1="1 = 0,10000, 10 = 0,02100, 100 = 0,00850, 1000 = 0,00382, 2500 = 0,00331 (USD)", REACH SVHC="No SVHC", RoHS=Yes, Stock 1=18983194, Supplier 1=Digi-Key, Termination=SMD/SMT, Weight=7.1E-05oz, Width=0.8mm
U1: "AVR AVR® ATmega Microcontroller IC 8-Bit 16MHz 16KB (8K x 16) FLASH 32-TQFP (7x7)", Package="TQFP-32 Microchip", Availability="In Stock", Check_prices=https://www.snapeda.com/parts/ATMEGA16U2-AU/Microchip/view-part/?ref=eda, MF=Microchip, MP=ATMEGA16U2-AU, Price=None, Purchase-URL=https://pricing.snapeda.com/search?q=ATMEGA16U2-AU&ref=eda, SnapEDA_Link=https://www.snapeda.com/parts/ATMEGA16U2-AU/Microchip/view-part/?ref=snap
Y1 Y2: "Crystal or Oscillator", Manufacturer_Name=CTS, Mouser Part Number=774-ATS16B, Arrow Part Number=ATS16B, Arrow Price/Stock=https://www.arrow.com/en/products/ats16b/cts, Datasheet Link=https://componentsearchengine.com/Datasheets/1/ATS16B.pdf, Height=4.3mm, Manufacturer_Part_Number=ATS16B, Mouser Price/Stock=https://www.mouser.co.uk/ProductDetail/CTS-Electronic-Components/ATS16B?qs=tjlMjqRIEYRZOBq8cfzh0Q%3D%3D

## Via types
v1: diameter 0.8, hole 0.4, Top Layer to Bottom Layer, 23 vias
v2: diameter 0.45, hole 0.3, Top Layer to Bottom Layer, 2 vias

## Nets (pads, with @x,y where several pads share a name; then routed paths per layer and width w, separated by ;. In a path a pad name is that pad's centre, name@x,y a point inside that pad or via, vN(x,y) a via of type N, cw(c..) or ccw(c..) an arc to the next point about the centre after c; other vN are vias at no path point)
3V3: B2.5 B3.2 C9.2 P1.4 | length 104.7
  Top Layer w0.254: B2.5 41.83,103.11 40.389,101.669 40.389,100.331 ; B3.2 42.436,99.099 41.621,99.099 40.389,100.331 ; P1.4 98.424,122.186 97.082,123.528 34.638,123.528 32.9,121.79 32.9,104.328 34.599,102.629 34.599,100.956 35.224,100.331 C9.2 40.389,100.331
AD0: B1.23 P4.6 | length 22.4
  Top Layer w0.254: B1.23 92.83,80 92.83,67.187 P4.6
AD1: B1.24 P4.5 | length 22.4
  Top Layer w0.254: B1.24 95.37,80 95.37,67.187 P4.5
AD2: B1.25 P4.4 | length 22.4
  Top Layer w0.254: B1.25 97.91,80 97.91,67.187 P4.4
AD3: B1.26 P4.3 | length 22.4
  Top Layer w0.254: B1.26 100.45,80 100.45,70 100.434,69.984 P4.3
AD4/SDA: B1.27 P2.2 P4.2 | length 46.1
  Top Layer w0.254: P2.2 86.47,68.521 86.969,69.02 89.63,69.02 90.7,67.95 90.7,65.62 91.59,64.73 102.81,64.73 102.974,64.894 P4.2 102.974,69.984 102.99,70 102.99,80 B1.27
AD5/SCL: B1.28 P2.1 P4.1 | length 44.4
  Top Layer w0.254: P2.1 89.587,66.483 89.587,65.063 91.1,63.55 104.81,63.55 105.514,64.254 P4.1 105.514,69.984 105.53,70 105.53,80 B1.28
AREF: B1.21 P2.4 | length 20.5
  Top Layer w0.254: B1.21 80.96,83.189 80.188,82.417 80.188,68.262 P2.4
AVCC: B1.7 B1.20 B2.1 B2.3 B3.8 B4.2 B4.4 C1.2 C2.2 C10.2 C12.1 C13.1 D3.1 D4.1 J2.2 J3.2 P1.2 P1.5 Q1.2 R3.2 R4.2 R8.2 R9.2 R10.2 U1.4 U1.32 | length 305
  Top Layer w0.254: C13.1@30.206,100.331 C10.2 ; v1(31.38,102.1) 31.38,101.531 C13.1 29.555,99.705 28.795,99.705 28.66,99.57 28.66,96.59 29.75,95.5 32.98,95.5 34.057,96.577 36.04,96.577 37.567,96.577 38.07,97.08 R10.2 ; 36.04,96.52 36.15,96.41 36.15,91.35 36.45,91.05 R9.2 R8.2 ; v1(36.07,103.72) 36.07,105.21 C12.1 C12.1@36.03,105.69 ; R4.2 39.88,66.36 D4.1 ; B4.2 42.39,115.01 ; v1(43.81,113.59) 42.39,115.01 ; v1(44.45,121.97) 95.42,121.97 95.884,121.506 P1.5 95.96,118.096 95.96,116.869 96.459,116.37 98.97,116.37 99.68,117.08 99.68,119.26 99.99,119.57 103.2,119.57 103.504,119.266 P1.2 103.504,106.684 R3.2 102.79,102.565 D3.1 ; v1(45.93,102.01) 46.02,102.1 46.02,103.54 Q1.2 46.28,103.8 46.28,106.78 45.88,107.18 42.08,107.18 41.83,106.93 B2.1 41.83,104.76 41.6,104.53 40.08,104.53 39.93,104.68 B2.3 39.757,105.737 36.077,105.737 C12.1@36.03,105.69 ; B3.8 46.88,100.32 v1(47.56,101) 48.73,102.17 48.73,104.521 49.795,105.587 49.819,105.587 50.624,106.392 C1.2 50.681,106.361 C2.2 ; v1(56.32,87.66) 56.35,87.63 56.35,86.01 U1.4 56.38,83.17 56.86,82.69 58.6,82.69 58.91,83 58.91,84.19 59.33,84.61 U1.32 ; J3.2 75.97,85.18 74.58,86.57 74.58,92.56 75.51,93.49 82.4,93.49 83.51,94.6 83.51,96.94 B1.7 ; C12.1@36.03,105.69 36.03,108.39 36.99,109.35 B4.4 42.39,115.01
  Bottom Layer w0.254: v1(31.38,102.1) 33,103.72 v1(36.07,103.72) ; D4.1 40.23,66.71 40.23,74.39 41.1,75.26 J2.2@46.56,75.26 ; v1(43.81,113.59) 45.05,113.59 45.55,114.09 45.55,121.38 44.96,121.97 v1(44.45,121.97) ; v1(45.93,102.01) 46.482,101.458 46.955,101.458 47.412,101 v1(47.56,101) 54.85,101 56.23,99.62 56.23,87.75 v1(56.32,87.66) 56.32,86.09 54.5,84.27 46.95,84.27 46.65,83.97 J2.2 ; J3.2 78.42,84.51 B1.20 ; B1.7 83.5,98.861 84.429,99.79 94.36,99.79 97.085,102.515 D3.1
CMP: B3.3 R10.1 R11.2 | length 4.9
  Top Layer w0.254: R10.1 R11.2 40.042,99.184 40.62,99.184 41.399,98.406 B3.3
D+: D1.2 J1.3 R1.1 | length 10.8
  Top Layer w0.254: J1.3 33.397,89.45 D1.2@33.52,89.573 ; D1.2 D1.2@33.52,89.573 ; R1.1@34.87,82.43 R1.1 ; R1.1@35.33,82.6 35.33,87.552 33.52,89.362 D1.2@33.52,89.573
D-: D2.2 J1.2 R2.1 | length 10.4
  Top Layer w0.254: J1.2 32.006,88.8 32.875,87.93 33.397,87.93 33.52,87.808 D2.2 33.52,87.233 33.777,87.49 33.95,87.49 34.77,86.67 34.77,84.51 33.97,83.71 33.32,83.71 R2.1
GND: B1.8 B1.22 B2.2 B3.4 B4.3 C1.1 C2.1 C3.2 C5.1 C6.2 C7.1 C8.2 C9.1 C10.1 C11.2 C12.2 C13.2 D7.1 FB1.1 GND.1 J2.6 J3.6 P1.6 P1.7 P2.3 R6.1 R11.1 U1.3 U1.28 | length 35.1
  Top Layer w0.254: v1(29.675,114.875) 29.675,113.395 C11.2 ; v2@29.885,103.73 29.885,105.445 C12.2 ; v1@30.175,96.67 30.175,98.524 C13.2 C9.1 ; FB1.1 34.92,94.17 v1(34.92,95.95) ; v1(38.86,116.08) 40.02,116.08 B4.3 ; R11.1 39.928,97.745 v2(40.805,97.745) 40.81,97.75 42.475,97.75 B3.4 ; v1(40.81,107.72) 40.81,106.025 40.903,105.933 B2.2 ; C1.1 C1.1@50.676,104.59 ; v1(51.85,102.85) 51.746,102.954 51.746,103.52 C1.1@50.676,104.59 ; C2.1 53.579,104.59 C1.1@50.676,104.59 ; v1(55.49,89.92) 55.5,89.93 56.726,89.93 C6.2 ; U1.3 57.19,85.97 v1(57.19,84.06) ; v1(58.05,81.43) 58.06,81.42 60.14,81.42 U1.28 ; C5.1@59.641,89.922 C5.1 60.97,89.93 v1@61.03,89.87 ; v1(62.38,75.27) 62.38,77.729 C3.2 ; v1(71.2,100.97) 71.34,100.97 72.04,100.27 C8.2 ; C7.1 75.439,100.375 76.665,100.375 v1(76.68,100.36)
  other v1: 61.03,89.96 52.31,93.86 63.75,93.93 30.15,96.67
  other v2: 29.9,103.73
GTE_CMD: B3.1 Q1.1 | length 4.6
  Top Layer w0.254: B3.1 42.48,101.6 44.21,103.33 Q1.1
IO0: B1.2 P3.8 R7.2 | length 26.5
  Top Layer w0.254: P3.8 89.17,112.483 R7.2 89.17,103.98 B1.2
IO1: B1.3 P3.7 R5.2 | length 26.5
  Top Layer w0.254: P3.7 87.61,111.503 87.61,104.07 R5.2 89.1,102.12 93.66,97.56 B1.3
IO2: B1.4 P3.6 | length 26.5
  Top Layer w0.254: P3.6 86.59,109.983 86.59,102.75 91.12,98.22 B1.4
IO3: B1.5 P3.5 | length 26.5
  Top Layer w0.254: P3.5 85.86,108.173 85.86,101.75 88.58,99.03 B1.5
IO4: B1.6 P3.4 | length 26.5
  Top Layer w0.254: P3.4 84.7,106.793 84.7,100.95 86.04,99.61 B1.6
IO5: B1.11 P3.3 | length 24.9
  Top Layer w0.254: P3.3 70.781,111.651 67.514,108.384 67.514,103.086 B1.11@73.495,97.105
IO6: B1.12 P3.2 | length 23.5
  Top Layer w0.254: P3.2 68.241,111.151 66.75,109.66 66.75,102.17 70.8,98.12 B1.12
IO7: B1.13 P3.1 | length 22.3
  Top Layer w0.254: P3.1 65.701,101.459 68.26,98.9 B1.13
IO8: B1.14 P2.10 | length 31.5
  Top Layer w0.254: B1.14 64.92,96.95 64.54,96.57 64.54,85.81 66.15,84.2 P2.10
IO9: B1.15 P2.9 | length 21
  Top Layer w0.254: B1.15 68.69,83.82 P2.9
L13: B3.6 B3.7 R12.2 | length 24.8
  Top Layer w0.254: R12.2 46.64,118.59 47.42,117.81 47.42,102.15 45.62,100.35 45.62,99.46 46.025,99.055 B3.7 B3.6
M8RXD: D6.1 R7.1 U1.9 | length 69.6
  Top Layer w0.254: D6.1 41.48,85.93 41.48,85.33 42.2,84.61 46.76,84.61 ; U1.9 46.76,84.61 ; R7.1 77.64,105.97 77.23,105.56 77.23,101.558 79.44,99.348 79.44,96.16 78.85,95.57 67.44,95.57 67.2,95.81 67.2,98.09 66.39,98.9 55.24,98.9 51.47,95.13 51.47,89.23 50.52,88.28 48.11,88.28 46.76,86.93 46.76,84.61
M8TXD: D5.1 R5.1 U1.8 | length 55.9
  Top Layer w0.254: D5.1 48.18,85.98 U1.8 53.18,94.44 56.78,98.04 66.08,98.04 66.56,97.56 66.56,95.27 66.99,94.84 ; 66.99,94.82 81.23,94.82 82.19,95.78 82.19,99.04 R5.1@78.475,102.755
MISO: B1.18 J3.1 P2.6 | length 22.8
  Top Layer w0.254: B1.18 74.34,85.79 74.34,79.96 ; J3.1 74.78,79.52 74.34,79.96 ; P2.6 74.34,69.03 74.34,79.96
MISO2: J2.1 U1.17 | length 12.6
  Top Layer w0.254: J2.1 46.65,71.85 46.9,71.6 49.873,71.6 50.41,72.137 50.41,76.13 51.381,77.101 53.032,77.101 53.18,77.249 U1.17
MOSI: B1.17 P2.7 | length 21
  Top Layer w0.254: B1.17 72.62,84.97 72.62,68.21 P2.7
MOSI2: J2.4 U1.16 | length 5.7
  Top Layer w0.254: J2.4 49.19,77.8 50.4,79.01 U1.16
NetC3_1: C3.1 U1.27 | length 3.1
  Top Layer w0.254: U1.27 62.221,80.61 62.37,80.461 62.37,79.781 C3.1
NetC4_1: C4.1 R6.2 U1.13 | length 19.6
  Top Layer w0.254: R6.2 34.29,77.79 35.64,79.14 43.41,79.14 44.634,80.364 48.755,80.364 C4.1 49.801,81.41 U1.13
NetD5_2: D5.2 R8.1 | length 12
  Top Layer w0.254: D5.2 45.42,88.95 45.82,89.35 48.95,89.35 49.89,90.29 49.89,92.9 R8.1
NetD6_2: D6.2 R9.1 | length 13.4
  Top Layer w0.254: D6.2 38.67,88.38 41.34,91.05 R9.1
NetD7_2: D7.2 R12.1 | length 5.5
  Top Layer w0.254: D7.2 51.93,115.61 R12.1
NetD8_2: D8.2 VIN.1 | length 4.5
  Top Layer w0.254: D8.2 29.813,121.126 VIN.1
Netf1_1: f1.1 J1.1 | length 30
  Top Layer w0.254: f1.1 26.83,69.19 26.36,69.66 26.36,83.1 27.44,84.18 33.7,84.18 34.235,84.715 34.235,86.225 33.704,86.756 32.908,86.756 31.586,88.077 31.023,88.077 J1.1
PB4: U1.18
PB5: U1.19
PB6: U1.20
PB7: U1.21
RD+: R1.2 U1.29 | length 56.4
  Top Layer w0.254: R1.2 34.62,80.76 34.272,80.412 34.272,80.162 33.15,79.04 33.15,72.15 35.7,69.6 61.49,69.6 64.43,72.54 64.43,81.29 63.51,82.21 U1.29
RD-: R2.2 U1.30 | length 60.9
  Top Layer w0.254: R2.2 31.94,80.33 31.94,70.84 34.2,68.58 61.53,68.58 65.18,72.23 65.18,81.6 63.82,82.96 U1.30@60.15,82.96
RESET: B1.1 C4.2 D3.2 J3.5 P1.3 R3.1 | length 105.2
  Top Layer w0.254: v1(47.55,82.52) 49.109,82.52 C4.2 ; J3.5 82.98,79.52 84.65,81.19 84.65,91.29 88.46,95.1 98.04,95.1 98.74,95.8 B1.1 93.175,102.515 D3.2 92.015,102.54 92.015,105.945 R3.1 91.99,114.5 93.16,115.67 99.52,115.67 100.964,117.114 P1.3
  Bottom Layer w0.254: v1(47.55,82.52) 47.55,78.58 48.66,77.47 80.5,77.47 81.05,78.02 J3.5
RESET2: D4.2 J2.5 R4.1 U1.24 | length 32.6
  Top Layer w0.254: R4.1 37.103,77.135 39.905,77.135 D4.2 42.05,77.11 43.11,76.05 43.11,71.39 43.87,70.63 50.23,70.63 51.73,72.13 J2.5 57.69,72.72 58.78,73.81 U1.24
RXLED: U1.10
SCK: B1.19 B3.5 J3.3 P2.5 | length 107
  Top Layer w0.254: B3.5 52.665,97.755 62.42,107.51 62.42,119.36 63.09,120.03 70.86,120.03 72.34,118.55 72.34,117.09 80.11,109.32 80.11,102.91 84.88,98.14 84.88,93.75 83.18,92.05 77.91,92.05 75.88,90.02 B1.19 77.33,85.34 77.33,81.44 78.51,80.26 J3.3 78.68,79.35 78.68,67.23 P2.5
SCK2: J2.3 U1.15 | length 10.5
  Top Layer w0.254: J2.3 48.04,73.87 48.04,78.323 49.527,79.81 U1.15
SHIELD: D1.1 D2.1 FB1.2 J1.6 J1.7 J1.8 J1.9 J1.10 | length 24
  Top Layer w0.254: J1.10@28.15,85.362 28.406,85.362 30.269,87.225 J1.7 31.375,87.225 32.969,85.63 33.397,85.63 33.52,85.507 D2.1 ; J1.10@28.15,85.45 J1.9 28.15,93.45 28.15,93.537 29.281,93.537 31.144,91.675 J1.6 33.397,91.675 33.52,91.798 D1.1 33.52,93.699 FB1.2
SS: B1.16 P2.8 | length 21
  Top Layer w0.254: B1.16 71.23,83.82 P2.8
TXLED: U1.11
USBVCC: f1.2 Q1.3 | length 39.5
  Top Layer w0.254: f1.2 28.56,81.15 29.34,81.93 35.88,81.93 36.339,82.389 36.339,87.769 39.77,91.2 39.77,96.19 40.5,96.92 44.59,96.92 45.16,97.49 Q1.3
VIN: B4.1 C11.1 D8.1 P1.8 | length 67.2
  Top Layer w0.254: C11.1 35.79,113.24 35.79,118.04 36.405,118.655 D8.1 ; B4.1 44.69,116.3 44.342,116.648 44.192,116.648 42.185,118.655 D8.1 ; P1.8 88.264,120.466 87.71,121.02 41.43,121.02 40.961,120.551 40.961,119.103 D8.1
X1_AT16: C5.2 U1.1 Y1.2 | length 9.5
  Top Layer w0.254: U1.1 58.803,86.003 58.803,89.907 C5.2 58.683,90.074 58.683,93.633 59.21,94.16 Y1.2
X1_AT328: B1.9 C7.2 Y2.2 | length 9.7
  Top Layer w0.254: Y2.2 74.616,102.634 C7.2 74.663,100.39 74.822,100.231 74.822,100.052 77.755,97.118 78.252,97.118 B1.9
X2_AT16: C6.1 U1.2 Y1.1 | length 10.2
  Top Layer w0.254: Y1.1 56.98,94.16 57.544,93.596 C6.1 57.544,88.026 57.98,87.59 U1.2
X2_AT328: B1.10 C8.1 Y2.1 | length 11.8
  Top Layer w0.254: Y2.1 70.64,104.12 72.894,101.866 C8.1 72.94,100.27 73.099,100.111 73.099,99.731 B1.10
pads on no net: B2.4 J1.4 J1.5 J3.4 P1.1 U1.5 U1.6 U1.7 U1.12 U1.14 U1.22 U1.23 U1.25 U1.26 U1.31

## Polygon pours and split planes (outlines as drawn)
GND on Bottom Layer (solid, pour order 0): 25.523,61.694 25.523,125.284 108.623,125.284 108.773,125.434 108.773,61.724 25.553,61.724

## Keep-outs
Keep-Out Layer:
  lines w0.5: 108.61,61.68 25.36,61.68 25.36,125.488 108.61,125.488 108.61,125.42 108.61,61.71